# EAGLE board xbee-adapter (EAGLE 5.11)
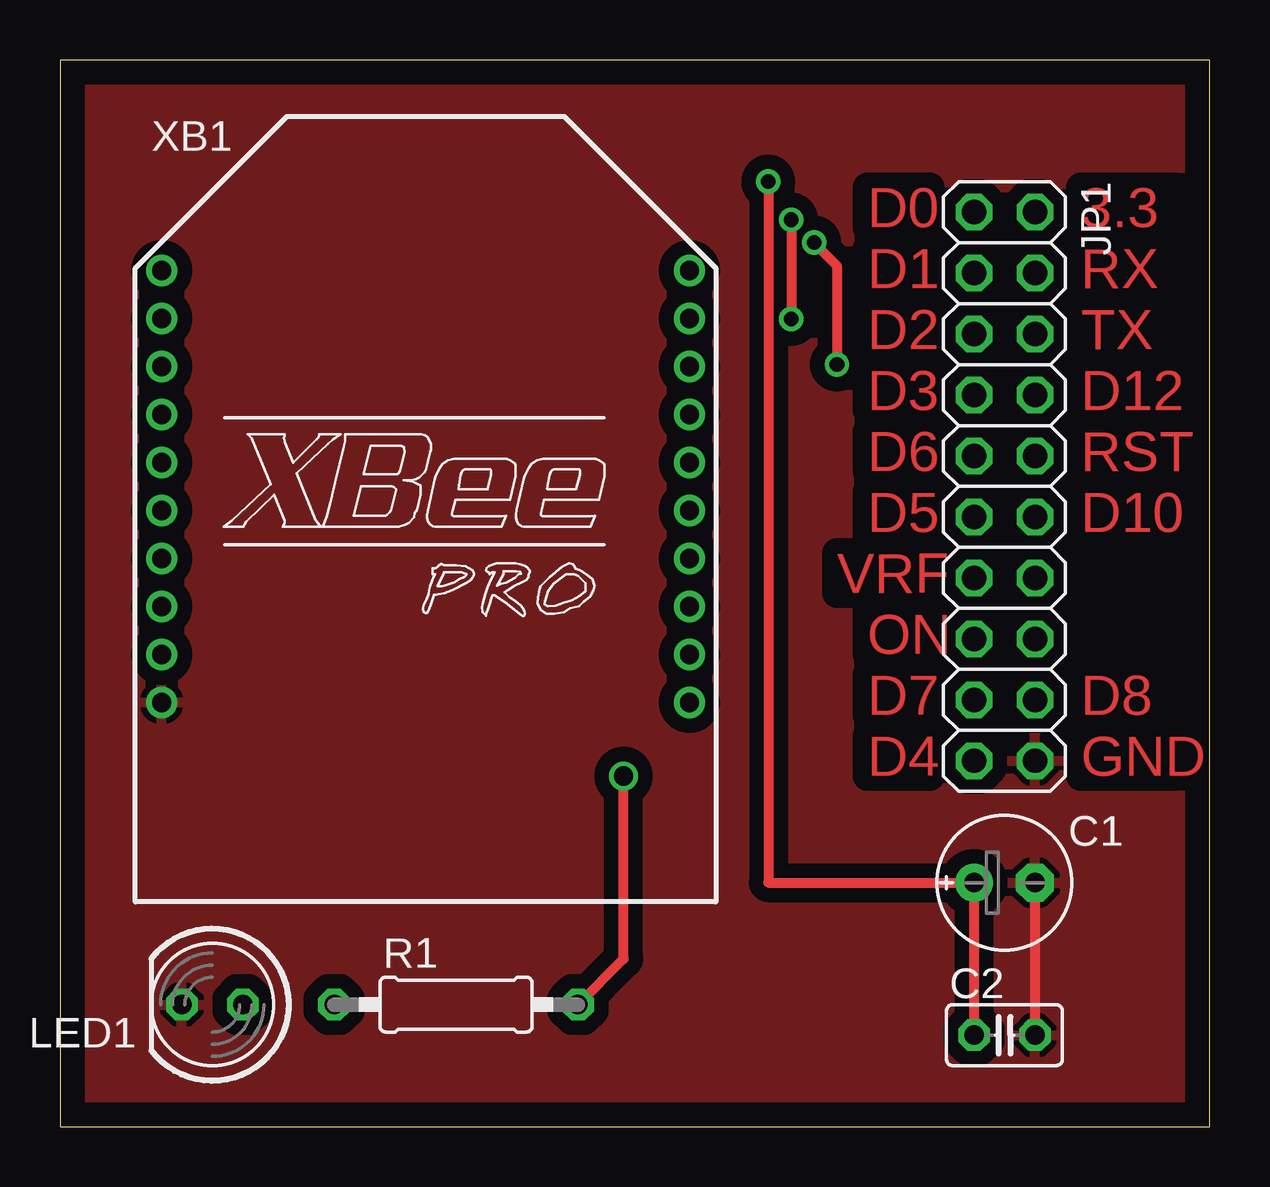
[diagram p0: board, top side]
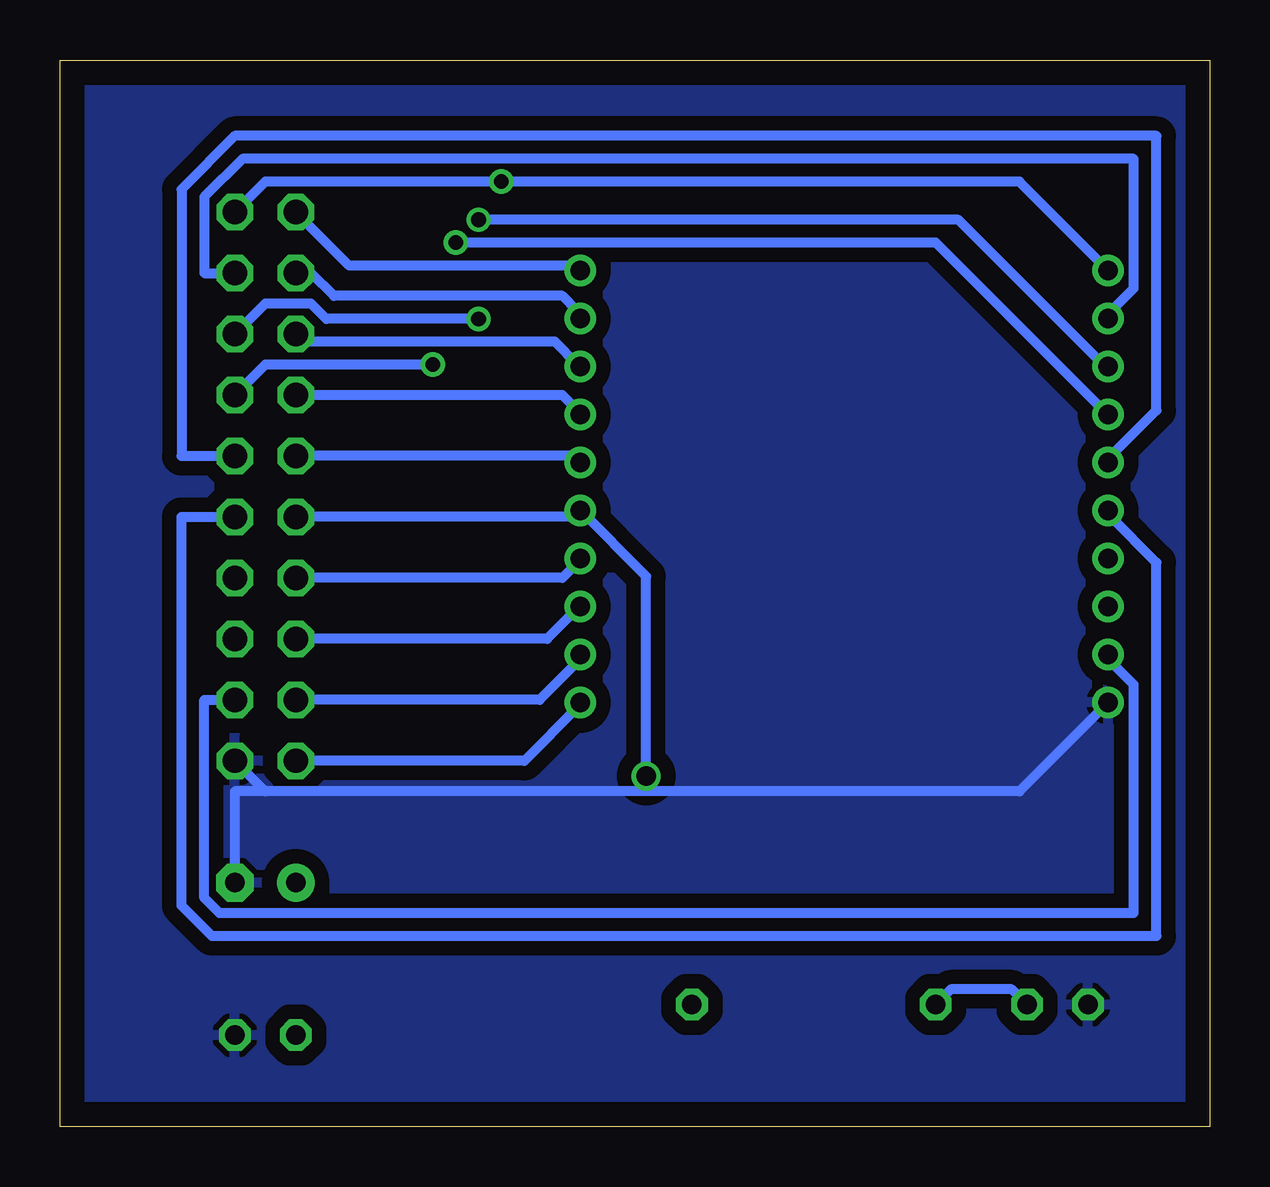
[diagram p1: board, bottom side, seen from below]

Size 47.93 x 44.44 mm. Coordinates in mm from the lower left corner, seen from the top.
Outline: 0,0 47.93,0 47.93,44.44 0,44.44 0,0
Copper layers (1*16): Top 0.035mm / dielectric 1.5mm / Bottom 0.035mm
Design rules "default *": minimum track width 16mil, minimum drill 24mil, track to track 12mil, track to pad 8mil, pad to pad 8mil, via to via 8mil, smd to smd 8mil, copper to edge 40mil, drill to drill 8mil, minimum pad ring 10mil, minimum via ring 8mil, stop-mask expansion 4mil, vias tented up to drill 0mil, thermal gap 10mil

## Footprints (pad centres in the part's own frame; a part is rotated, then mirrored left to right if it is on the bottom)
E2,5-6E = drill 0.813 pad 1.575 round: + -1.27,0 | drill 0.813 pad 1.575 octagon: - 1.27,0
C025-025X050 = drill 0.813 octagon: 1 -1.27,0; 2 1.27,0
2X10 = drill 1.016 octagon: 1 -11.43,-1.27; 2 -11.43,1.27; 3 -8.89,-1.27; 4 -8.89,1.27; 5 -6.35,-1.27; 6 -6.35,1.27; 7 -3.81,-1.27; 8 -3.81,1.27; 9 -1.27,-1.27; 10 -1.27,1.27; 11 1.27,-1.27; 12 1.27,1.27; 13 3.81,-1.27; 14 3.81,1.27; 15 6.35,-1.27; 16 6.35,1.27; 17 8.89,-1.27; 18 8.89,1.27; 19 11.43,-1.27; 20 11.43,1.27
LED5MM = drill 0.813 octagon: A -1.27,0; K 1.27,0
0207/10 = drill 0.813 octagon: 1 -5.08,0; 2 5.08,0
XBEE-PRO = drill 0.8 pad 1.27 round: 1 -11,9; 2 -11,7; 3 -11,5; 4 -11,3; 5 -11,1; 6 -11,-1; 7 -11,-3; 8 -11,-5; 9 -11,-7; 10 -11,-9; 11 11,-9; 12 11,-7; 13 11,-5; 14 11,-3; 15 11,-1; 16 11,1; 17 11,3; 18 11,5; 19 11,7; 20 11,9

## Placement (x,y rotation side)
C1  [E2,5-6E]  39.37,10.16 0 top
C2  [C025-025X050]  39.37,3.81 0 top
JP1  [2X10]  39.37,26.67 270 top
LED1  [LED5MM]  6.35,5.08 180 top
R1  [0207/10]  16.51,5.08 0 top
XB1  XBEE-PRO  [XBEE-PRO]  15.24,26.67 0 top

## Library data of the parts
C1 C2 R1 = resistor
JP1 = pinhead
LED1 = led
XB1 = maxstream; MPN: XBP24-AWI-001; OC_FARNELL: 1337916; OC_NEWARK: 42M2667

## Nets
+3V3: C1.+ C2.1 JP1.2 XB1.1
AD0/DIO0: JP1.1 XB1.20
AD1/DIO1: JP1.3 XB1.19
AD2/DIO2: JP1.5 XB1.18
AD3/DIO3: JP1.7 XB1.17
AD5/DIO5: JP1.11 R1.2 XB1.15
AD6/DIO6: JP1.9 XB1.16
DIO4: JP1.19 XB1.11
DIO7: JP1.17 XB1.12
GND: C1.- C2.2 JP1.20 LED1.K XB1.10
N$1: LED1.A R1.1
N$5: JP1.4 XB1.2
N$6: JP1.6 XB1.3
N$7: JP1.8 XB1.4
N$8: JP1.10 XB1.5
N$9: JP1.12 XB1.6
N$10: JP1.18 XB1.9
ON: JP1.15 XB1.13
VREF: JP1.13 XB1.14

## Tracks (layer width: path | path; a pad name or v marks a point on that pad's centre or on a via)
+3V3  (via drill 0.61)
  Top 0.406: C2.1 C1.+ 29.53,10.16 v29.53,39.37
  Bottom 0.406: JP1.2 39.37,39.37 v29.53,39.37 7.94,39.37 4.45,35.88 XB1.1
AD0/DIO0
  Bottom 0.406: JP1.1 35.88,35.88 26.35,35.88 XB1.20
AD1/DIO1
  Bottom 0.406: JP1.3 37.47,35.56 36.51,34.61 26.99,34.61 26.35,33.97 XB1.19
AD2/DIO2
  Bottom 0.406: JP1.5 37.78,32.7 27.3,32.7 26.35,31.75 XB1.18
AD3/DIO3
  Bottom 0.406: JP1.7 26.99,30.48 26.35,29.84 XB1.17
AD5/DIO5  (via drill 0.8 pad 0.81)
  Top 0.406: R1.2 23.5,6.99 v23.5,14.61
  Bottom 0.406: JP1.11 26.35,25.4 XB1.15 23.5,22.93 v23.5,14.61
AD6/DIO6
  Bottom 0.406: JP1.9 26.35,27.94 XB1.16
DIO4
  Bottom 0.406: JP1.19 28.57,15.24 26.35,17.46 XB1.11
DIO7
  Bottom 0.406: JP1.17 27.94,17.78 26.35,19.37 XB1.12
GND
  Top 0.406: C1.- C2.2
  Bottom 0.406: 39.37,13.97 7.94,13.97 4.45,17.46 XB1.10 | 39.37,13.97 JP1.20 | C1.- 40.64,13.97 39.37,13.97
  pour Top (isolate 0.61): 0,44.45 0,0 48.26,0 48.26,44.45
  pour Bottom (isolate 0.61): 0,44.45 48.26,44.45 48.26,0 0,0
N$1
  Bottom 0.406: LED1.A 8.26,5.71 10.79,5.71 R1.1
N$5
  Bottom 0.406: JP1.4 41.91,35.56 41.91,38.73 40.32,40.32 3.17,40.32 3.17,34.92 4.13,33.97 XB1.2
N$6  (via drill 0.61)
  Top 0.406: v30.48,37.78 v30.48,33.66
  Bottom 0.406: v30.48,37.78 10.48,37.78 4.45,31.75 XB1.3 | v30.48,33.66 36.83,33.66 37.47,34.29 39.37,34.29 JP1.6
N$7  (via drill 0.61)
  Top 0.406: v31.43,36.83 32.38,35.88 v32.38,31.75
  Bottom 0.406: v31.43,36.83 11.43,36.83 4.45,29.84 XB1.4 | v32.38,31.75 39.37,31.75 JP1.8
N$8
  Bottom 0.406: JP1.10 42.86,27.94 42.86,39.05 40.64,41.27 2.22,41.27 2.22,29.84 4.13,27.94 XB1.5
N$9
  Bottom 0.406: JP1.12 42.86,25.4 42.86,9.21 41.59,7.94 2.22,7.94 2.22,23.5 4.13,25.4 XB1.6
N$10
  Bottom 0.406: JP1.18 41.91,17.78 41.91,9.53 41.27,8.89 3.17,8.89 3.17,18.41 4.13,19.37 XB1.9
ON
  Bottom 0.406: JP1.15 27.62,20.32 26.35,21.59 XB1.13
VREF
  Bottom 0.406: JP1.13 26.99,22.86 26.35,23.5 XB1.14

## Text on the board
Top: D0 | 3.3 | D1 | RX | D2 | TX | D3 | D12 | D6 | RST | D5 | D10 | VRF | ON | D7 | D8 | D4 | GND